# Altium PCB PCB1.pcbdoc
Units mm, origin at the board's own origin, x right, y up, seen from the top; angles counter-clockwise.
Board outline 87.77 x 46.7 mm, 2 copper layers (Top Layer, Bottom Layer); 64 components, 50 nets, 224 pads, 100 vias.
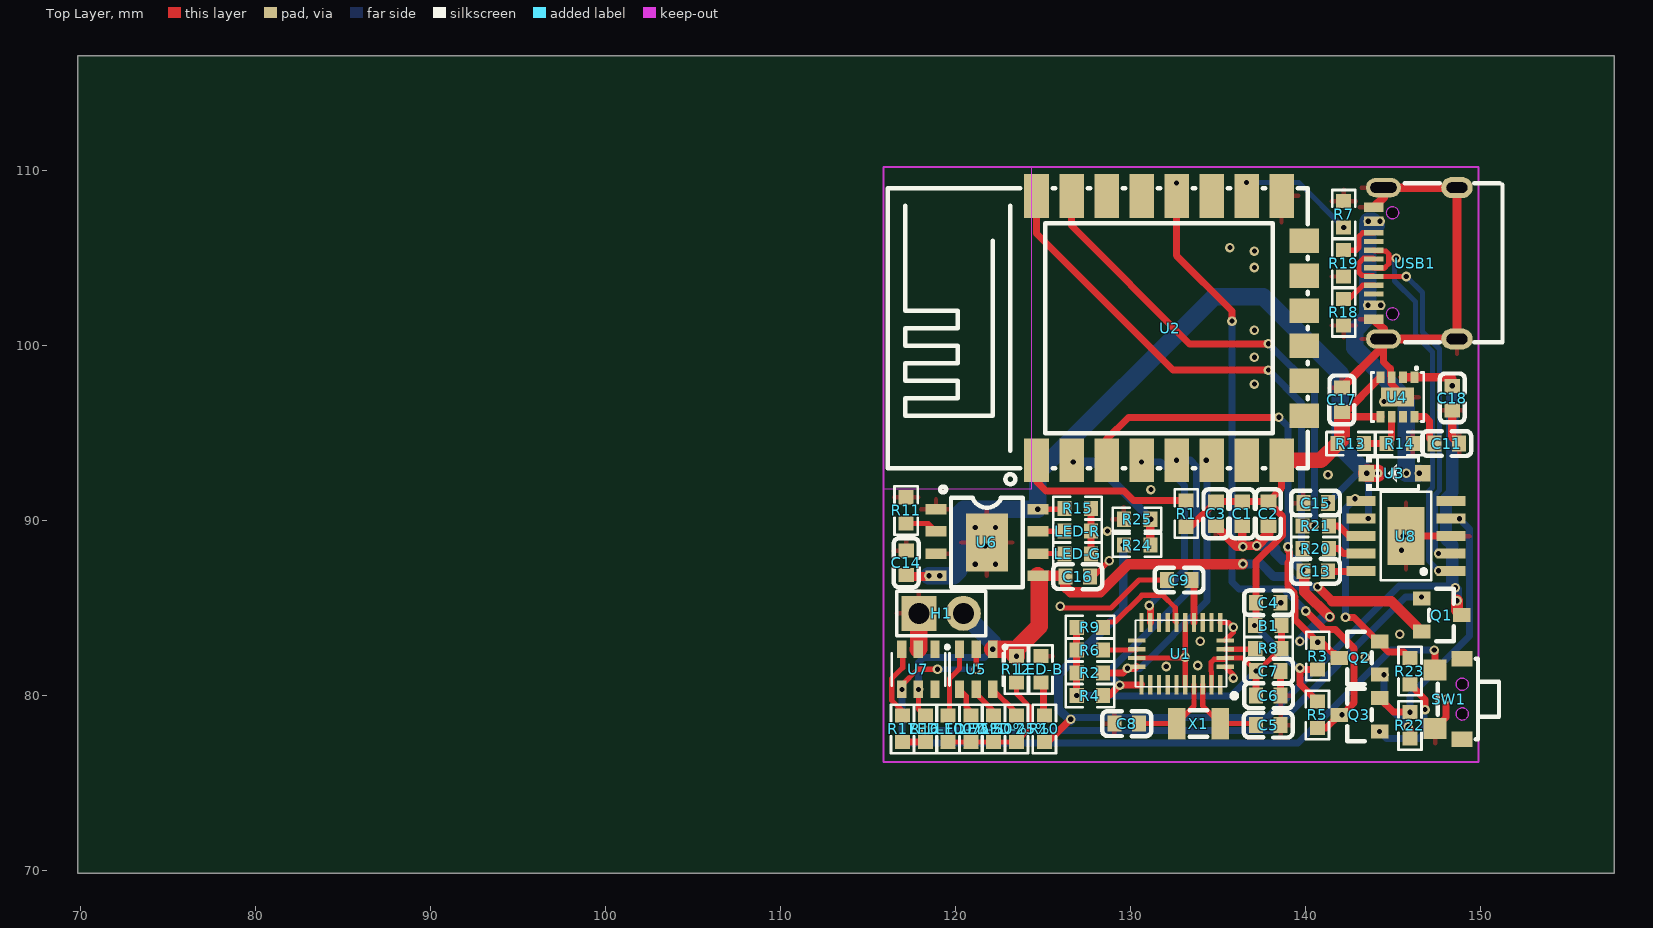
[diagram p0: Top Layer view]
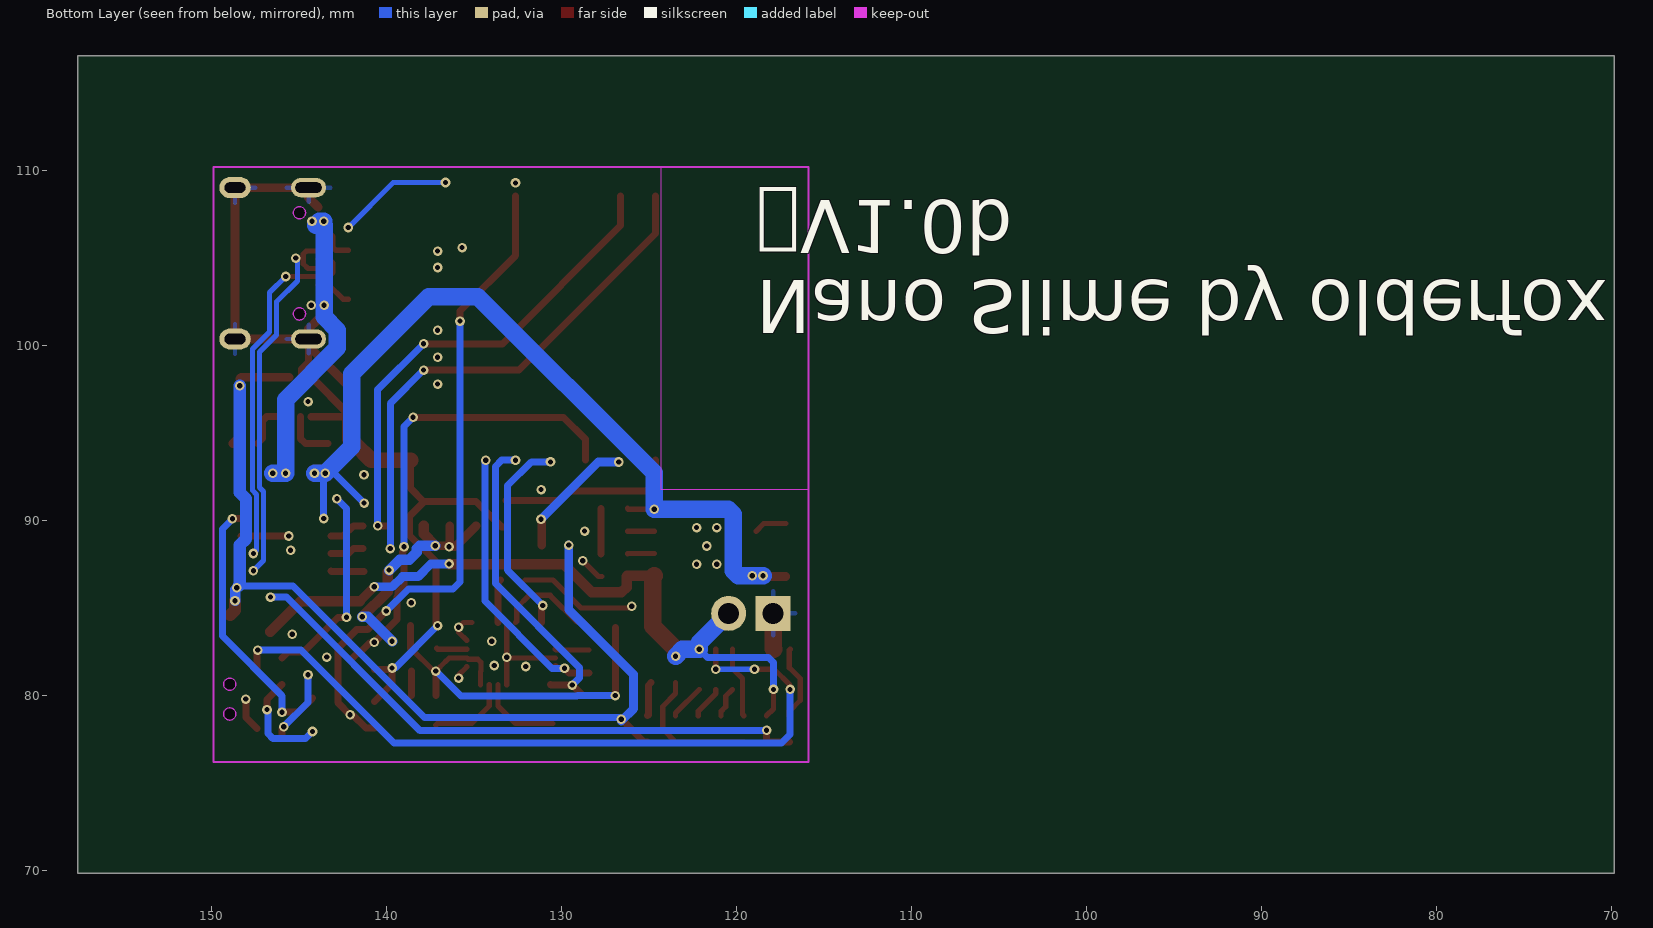
[diagram p1: Bottom Layer view, seen from below]

## Layer stack, top to bottom
Top Layer: signal copper (thickness not stored)
Dielectric: dielectric 0.32, FR-4, Dk 4.8
Bottom Layer: signal copper (thickness not stored)

## Board outline
157.623,69.85 69.85,69.85 69.85,116.55 157.623,116.55

## Design rules (kind name [scope] priority, off if disabled: settings)
BoardOutlineClearance copperThickness1oz [All] p0: genericclearance=0.254 ignorepadtopadclearanceinfootprint=FALSE except(0: Arc-SplitContinuation Track-SplitContinuation SMDPad-SplitContinuation THPad-SplitContinuation Via-SplitContinuation Fill-SplitContinuation Poly-SplitContinuation Region-SplitContinuation Text-SplitContinuation; 0.152: SMDPad-CutoutEdge THPad-CutoutEdge Via-CutoutEdge Fill-CutoutEdge Region-CutoutEdge; 0.3: Track-OutlineEdge SMDPad-OutlineEdge THPad-OutlineEdge Via-OutlineEdge Fill-OutlineEdge Region-OutlineEdge Poly-OutlineEdge Text-OutlineEdge Track-CutoutEdge)
BoardOutlineClearance copperThickness2oz [All] p0: genericclearance=0.254 ignorepadtopadclearanceinfootprint=FALSE except(0: Arc-SplitContinuation Track-SplitContinuation SMDPad-SplitContinuation THPad-SplitContinuation Via-SplitContinuation Fill-SplitContinuation Poly-SplitContinuation Region-SplitContinuation Text-SplitContinuation; 0.152: SMDPad-CutoutEdge THPad-CutoutEdge Via-CutoutEdge Fill-CutoutEdge Region-CutoutEdge; 0.3: Track-OutlineEdge SMDPad-OutlineEdge THPad-OutlineEdge Via-OutlineEdge Fill-OutlineEdge Region-OutlineEdge Poly-OutlineEdge Text-OutlineEdge Track-CutoutEdge)
Clearance copperThickness1oz [(InNet('VDD') OR InNet('VDDA') OR InNet('GND') OR InNet('OSC2') OR InNet('OSC1') OR InNet('CAP2') OR InNet('CAP1') OR InNet('VBAT') OR InNet('LED1') OR InNet('$1N34678') OR InNet('LED2') OR InNet('LED3') OR InNet('LED4') OR InNet('$1N12478') OR InNet('STBY') OR InNet('$1N26812') OR InNet('CHRG') OR InNet('$1N9628') OR InNet('RTS') OR InNet('EN') OR InNet('$1N9784') OR InNet('DTR') OR InNet('IO0') OR InNet('BAT+') OR InNet('$1N34452') OR InNet('SDA') OR InNet('SCL') OR InNet('SDO') OR InNet('$1N10095') OR InNet('$1N10091') OR InNet('BOOT') OR InNet('NRST') OR InNet('RXD0') OR InNet('RXD') OR InNet('TXD0') OR InNet('TXD') OR InNet('VBUS') OR InNet('ISET') OR InNet('MOS') OR InNet('KEY') OR InNet('INT1') OR InNet('D+') OR InNet('D-') OR InNet('VCCIN') OR InNet('RST') OR InNet('IO15') OR InNet('DCSS') OR InNet('DCFB') OR InNet('INT2') OR InNet('ADC'))] p1: gap=0.178 ignorepadtopadclearanceinfootprint=FALSE except(0.102: Track-Track; 0.152: Track-SMDPad SMDPad-SMDPad Track-THPad SMDPad-THPad THPad-THPad Track-Via SMDPad-Via THPad-Via Via-Via Track-Fill SMDPad-Fill THPad-Fill Via-Fill Fill-Fill SMDPad-Region THPad-Region Via-Region Fill-Region Region-Region Track-Poly SMDPad-Poly THPad-Poly Via-Poly Fill-Poly Poly-Poly Track-Text SMDPad-Text THPad-Text Via-Text Fill-Text Region-Text Poly-Text Text-Text; 0.175: Track-Hole SMDPad-Hole THPad-Hole Via-Hole Fill-Hole Region-Hole Poly-Hole Text-Hole Sheet-Hole; 0.3: Track-Region Region-Poly Track-Sheet SMDPad-Sheet THPad-Sheet Via-Sheet Fill-Sheet Region-Sheet Poly-Sheet Text-Sheet)
Clearance copperThickness2oz [All] p1: gap=0.178 ignorepadtopadclearanceinfootprint=FALSE except(0.152: Track-SMDPad SMDPad-SMDPad Track-THPad SMDPad-THPad THPad-THPad Track-Via SMDPad-Via THPad-Via Via-Via Track-Fill SMDPad-Fill THPad-Fill Via-Fill Fill-Fill SMDPad-Region THPad-Region Via-Region Fill-Region Region-Region Track-Poly SMDPad-Poly THPad-Poly Via-Poly Fill-Poly Poly-Poly Track-Text SMDPad-Text THPad-Text Via-Text Fill-Text Region-Text Poly-Text Text-Text; 0.175: Track-Hole SMDPad-Hole THPad-Hole Via-Hole Fill-Hole Region-Hole Poly-Hole Text-Hole Sheet-Hole; 0.203: Track-Track; 0.3: Track-Region Region-Poly Track-Sheet SMDPad-Sheet THPad-Sheet Via-Sheet Fill-Sheet Region-Sheet Poly-Sheet Text-Sheet)
DiffPairsRouting differentialPair [All] p1: maxuncoupledlength=10 minlimit=5.9843 maxlimit=5.9843 mostfreqgap=5.9843 toplayer_minwidth=5 toplayer_prefwidth=10 toplayer_maxwidth=100 bottomlayer_minwidth=5 bottomlayer_prefwidth=10 bottomlayer_maxwidth=100
PasteMaskExpansion pasteMaskExpansion [All] p1: expansion=0
PlaneConnect innerPlane [All] p1: planeconnectstyle=Relief reliefexpansion=0.508 reliefentries=4 reliefconductorwidth=0.254 reliefairgap=0.254
PolygonConnect copperRegion [All] p1: connectstyle=Relief reliefentries=4 reliefconductorwidth=10 polygonreliefangle="90 Angle" airgapwidth=10
RoutingVias viaSize [All] p1: viastyle="Through Hole" holewidth=12.0078 minholewidth=11.811 maxholewidth=248.0314 width=24.0158 minwidth=19.685 maxwidth=393.7008
SolderMaskExpansion solderMaskExpansion [All] p1: useseparateexpansions=TRUE expansion=2.0079 expansionbottom=2.0079
Width copperThickness1oz [All] p1: maxlimit=100 minlimit=12 preferedwidth=31
Width copperThickness2oz [All] p1: maxlimit=100 minlimit=12 preferedwidth=31

## Components (designator, comment, footprint, x,y, rotation, side; value= is the part's Value field where it differs from the comment)
B1 "" R0603 137.872,84 r0 top locked
C1 "" C0603 136.372,90.4 r90 top
C2 "" C0603 137.872,90.4 r90 top
C3 "" C0603 134.872,90.4 r90 top
C4 "" C0603 137.872,85.3 r180 top locked
C5 "" C0603 137.872,78.315 r0 top
C6 "" C0603 137.872,80 r180 top locked
C7 "" C0603 137.872,81.4 r180 top locked
C8 "" C0603 129.772,78.4 r180 top
C9 "" C0603 132.772,86.6 r0 top
C11 "" C0603 148.072,94.4 r0 top
C13 "" C0603 140.572,87.1 r0 top
C14 "" C0603 117.172,87.589 r270 top
C15 "" C0603 140.572,91 r0 top
C16 "" C0603 126.972,86.8 r180 top
C17 "" C0603 142.072,96.9 r90 top
C18 "" C0603 148.372,97 r270 top
H1 "" HDR-TH_2P-P2.54-V-M 119.172,84.7 r0 top
LED-25% "" R0603 123.472,78.1 r90 top locked
LED-50% "" R0603 122.172,78.1 r90 top locked
LED-75% "" R0603 120.872,78.1 r90 top locked
LED-100% "" R0603 119.572,78.1 r90 top locked
LED-B "" R0603 124.872,81.5 r90 top
LED-G "" R0603 126.972,88.1 r180 top
LED-R "" R0603 126.972,89.4 r180 top
Q1 "" SOT-23_L2.9-W1.3-P1.90-LS2.4-BR 147.772,84.6 r180 top
Q2 "" SOT-23_L2.9-W1.3-P1.90-LS2.4-BR 143.074,82.154 r0 top
Q3 "" SOT-23_L2.9-W1.3-P1.90-LS2.4-BR 143.072,78.9 r0 top
R1 "" R0603 133.172,90.4 r270 top
R2 "" R0603 127.672,81.3 r0 top locked
R3 "" R0603 140.688,82.255 r270 top
R4 "" R0603 127.672,80 r0 top locked
R5 "" R0603 140.672,78.9 r90 top
R6 "" R0603 127.672,82.6 r180 top locked
R7 "" R0603 142.172,107.5 r90 top
R8 "" R0603 137.872,82.7 r0 top locked
R9 "" R0603 127.672,83.9 r180 top locked
R10 "" R0603 125.072,78.1 r270 top
R11 "" R0603 117.172,90.582 r270 top
R12 "" R0603 123.472,81.5 r90 top locked
R13 "" R0603 142.572,94.4 r180 top
R14 "" R0603 145.372,94.4 r0 top
R15 "" R0603 126.972,90.7 r0 top
R16 "" R0603 118.272,78.1 r270 top locked
R17 "" R0603 116.972,78.1 r90 top locked
R18 "" R0603 142.172,101.9 r270 top
R19 "" R0603 142.172,104.7 r270 top
R20 "" R0603 140.572,88.4 r180 top
R21 "" R0603 140.572,89.7 r180 top
R22 "" R0603 145.961,78.3 r270 top
R23 "" R0603 145.961,81.4 r270 top
R24 "" R0603 130.372,88.6 r180 top
R25 "" R0603 130.372,90.074 r0 top
SW1 "" SW-SMD_TS24CA 148.172,79.8 r270 top
U1 "" BNO08X 132.872,82.4 r270 top locked
U2 "" WIFIM-SMD_ESP-12F-ESP8266MOD 132.272,101 r0 top locked
U3 "" SOD-123_L2.7-W1.6-LS3.7-FD 145.072,92.7 r180 top
U4 "" USIP-8_L3.0-W2.8-P0.65-TL-EP 145.244,97.059 r270 top
U5 "" SOT-23-6_L2.9-W1.7-P0.95-LS2.8-BL 121.172,81.5 r180 top locked
U6 "" ESOP-8_L4.9-W3.9-P1.27-LS6.0-BL-EP 121.786,88.749 r270 top
U7 "" SOT-23-6_L2.9-W1.7-P0.95-LS2.8-BL 117.872,81.5 r180 top locked
U8 "" ESOP-10_L4.9-W3.9-P1.00-LS6.0-BL-EP 145.733,89.118 r90 top
USB1 "" USB-C-SMD_TYPE-C-6PIN-2MD-073 146.272,104.7 r90 top locked
X1 "" FC-135R_L3.2-W1.5 133.872,78.4 r0 top

## Footprints (in the part's own frame and the unit in brackets; to place one, negate y for a bottom-side part, rotate by r counter-clockwise, add the part's x,y. Pads: shape width x height; smd on the part's side, far side on the other; paste and mask are expansions set on the pad)
BNO08X [mm]
  rect 1.1x0.25 smd: 1(1.78,2.25) 6(-1.774,2.25) 7(-1.774,1.75) 8(-1.774,1.25) 9(-1.774,0.75) 10(-1.774,0.25) 11(-1.774,-0.25) 12(-1.774,-0.75) 13(-1.774,-1.25) 14(-1.774,-1.75) 15(-1.774,-2.25) 20(1.78,-2.25) 21(1.78,-1.75) 22(1.78,-1.25) 23(1.78,-0.75) 24(1.78,-0.25) 25(1.78,0.25) 26(1.78,0.75) 27(1.78,1.25) 28(1.78,1.75)
  rect 0.25x1 smd: 2(0.75,2.529) 3(0.25,2.529) 4(-0.25,2.529) 5(-0.75,2.529) 16(-0.75,-2.529) 17(-0.25,-2.529) 18(0.25,-2.529) 19(0.75,-2.529)
  silkscreen extent -1.9,-2.6 2.54,3.18
C0603 [mm]
  rect 0.8x0.9 smd: 1(-0.7,0) 2(0.7,0)
  silkscreen extent -1.41,-0.71 1.39,0.72
ESOP-8_L4.9-W3.9-P1.27-LS6.0-BL-EP [mm]
  rect 0.6x1.2 smd: 1(-1.905,-2.908) 2(-0.635,-2.908) 3(0.635,-2.908) 4(1.905,-2.908) 5(1.905,2.908) 6(0.635,2.908) 7(-0.635,2.908) 8(-1.905,2.908)
  rect 3.3x2.4 smd: 9(0,0)
  silkscreen extent -3.2,-2.67 2.55,2.05
ESOP-10_L4.9-W3.9-P1.00-LS6.0-BL-EP [mm]
  rect 0.56x1.64 smd: 1(-2,-2.57) 2(-1,-2.57) 3(0,-2.57) 4(1,-2.57) 5(2,-2.57) 6(2,2.57) 7(1,2.57) 8(0,2.57) 9(-1,2.57) 10(-2,2.57)
  rect 3.3x2.1 smd: 11(0,0)
  silkscreen extent -2.53,-1.45 2.53,1.45
FC-135R_L3.2-W1.5 [mm]
  rect 1x1.8 smd: 1(-1.25,0) 2(1.25,0)
  silkscreen extent -0.51,-0.76 0.51,0.76
HDR-TH_2P-P2.54-V-M [mm]
  rect 2x2 hole 1.2: 1(-1.27,0)
  round 2 hole 1.2: 2(1.27,0)
  silkscreen extent -2.54,-1.27 2.54,1.27
R0603 [mm]
  rect 0.806x0.864 smd: 1(-0.753,0) 2(0.753,0)
  silkscreen extent -1.39,-0.66 1.39,0.66
SOD-123_L2.7-W1.6-LS3.7-FD [mm]
  rect 0.88x0.96 smd: 1(-1.61,0) 2(1.61,0)
  silkscreen extent -1.38,-1 1.6,1
SOT-23-6_L2.9-W1.7-P0.95-LS2.8-BL [mm]
  rect 0.532x0.99 smd: 1(-0.95,-1.145) 2(0,-1.145) 3(0.95,-1.145) 4(0.95,1.145) 5(0,1.145) 6(-0.95,1.145)
  silkscreen extent -1.75,-1.37 1.53,0.93
SOT-23_L2.9-W1.3-P1.90-LS2.4-BR [mm]
  rect 1x0.8 smd: 1(1.15,-0.95) 2(1.15,0.95) 3(-1.15,0)
  silkscreen extent -0.7,-1.5 0.7,1.5
SW-SMD_TS24CA [mm]
  rect 0.9x1.2 smd: 1(-2.3,0.775) 2(2.3,0.775)
  rect 1.2x1.3 smd: 3(-1.675,-0.775) 4(1.675,-0.775)
  Board Outline Layer circle w0.005: c-0.85,0.775 r0.35
  Board Outline Layer circle w0.005: c0.85,0.775 r0.35
  Board Outline Layer region: -0.85,1.125 -0.698,1.09 -0.576,0.993 -0.509,0.853 -0.509,0.697 -0.576,0.557 -0.698,0.46 -0.85,0.425 -0.85,0.425 -1.002,0.46 -1.124,0.557 -1.191,0.697 -1.191,0.853 -1.124,0.993 -1.002,1.09 -0.85,1.125
  Board Outline Layer region: 0.85,1.125 1.002,1.09 1.124,0.993 1.191,0.853 1.191,0.697 1.124,0.557 1.002,0.46 0.85,0.425 0.85,0.425 0.698,0.46 0.576,0.557 0.509,0.697 0.509,0.853 0.576,0.993 0.698,1.09 0.85,1.125
  Multi-Layer board cut-out: -0.85,1.125 -0.698,1.09 -0.576,0.993 -0.509,0.853 -0.509,0.697 -0.576,0.557 -0.698,0.46 -0.85,0.425 -0.85,0.425 -1.002,0.46 -1.124,0.557 -1.191,0.697 -1.191,0.853 -1.124,0.993 -1.002,1.09 -0.85,1.125
  Multi-Layer board cut-out: 0.85,1.125 1.002,1.09 1.124,0.993 1.191,0.853 1.191,0.697 1.124,0.557 1.002,0.46 0.85,0.425 0.85,0.425 0.698,0.46 0.576,0.557 0.509,0.697 0.509,0.853 0.576,0.993 0.698,1.09 0.85,1.125
  silkscreen extent -2.3,-0.62 2.3,2.88
USB-C-SMD_TYPE-C-6PIN-2MD-073 [mm]
  rect 0.55x1.1 smd: 1(-3.2,2.375) 2(-2.4,2.375) 11(2.4,2.375) 12(3.2,2.375)
  rect 0.3x1.1 smd: 3(-1.75,2.375) 4(-1.25,2.375) 5(-0.75,2.375) 6(-0.25,2.375) 7(0.25,2.375) 8(0.75,2.375) 9(1.25,2.375) 10(1.75,2.375)
  oval 1.2x1.8 hole 0.6 slot 1.2 at 90 deg: 13(-4.325,-2.375) 14(4.325,-2.375)
  oval 1.1x2 hole 0.6 slot 1.5 at 90 deg: 13(-4.325,1.825) 14(4.325,1.825)
  Board Outline Layer circle w0.005: c-2.89,1.305 r0.35
  Board Outline Layer circle w0.005: c2.89,1.305 r0.35
  Board Outline Layer region: -2.89,0.955 -3.042,0.99 -3.164,1.087 -3.231,1.227 -3.231,1.383 -3.164,1.523 -3.042,1.62 -2.89,1.655 -2.89,1.655 -2.738,1.62 -2.616,1.523 -2.549,1.383 -2.549,1.227 -2.616,1.087 -2.738,0.99 -2.89,0.955
  Board Outline Layer region: 2.89,0.955 2.738,0.99 2.616,1.087 2.549,1.227 2.549,1.383 2.616,1.523 2.738,1.62 2.89,1.655 2.89,1.655 3.042,1.62 3.164,1.523 3.231,1.383 3.231,1.227 3.164,1.087 3.042,0.99 2.89,0.955
  Multi-Layer board cut-out: -2.89,0.955 -3.042,0.99 -3.164,1.087 -3.231,1.227 -3.231,1.383 -3.164,1.523 -3.042,1.62 -2.89,1.655 -2.89,1.655 -2.738,1.62 -2.616,1.523 -2.549,1.383 -2.549,1.227 -2.616,1.087 -2.738,0.99 -2.89,0.955
  Multi-Layer board cut-out: 2.89,0.955 2.738,0.99 2.616,1.087 2.549,1.227 2.549,1.383 2.616,1.523 2.738,1.62 2.89,1.655 2.89,1.655 3.042,1.62 3.164,1.523 3.231,1.383 3.231,1.227 3.164,1.087 3.042,0.99 2.89,0.955
  silkscreen extent -4.5,-4.97 4.57,0.6
USIP-8_L3.0-W2.8-P0.65-TL-EP [mm]
  rect 0.65x0.45 smd: 1(-1.125,0.975) 2(-1.125,0.325) 3(-1.125,-0.325) 4(-1.125,-0.975) 5(1.125,-0.975) 6(1.125,-0.325) 7(1.125,0.325) 8(1.125,0.975)
  rect 1.1x1.9 smd: 9(0,0)
  silkscreen extent -1.73,-1.5 1.4,1.5
WIFIM-SMD_ESP-12F-ESP8266MOD [mm]
  rect 1.4x2.5 smd: 1(-7.651,-7.551) 2(-5.651,-7.551) 3(-3.651,-7.551) 4(-1.651,-7.551) 5(0.349,-7.551) 6(2.349,-7.551) 7(4.349,-7.551) 8(6.349,-7.551) 9(6.349,7.549) 10(4.349,7.55) 11(2.349,7.551) 12(0.349,7.551) 13(-1.651,7.55) 14(-3.651,7.551) 15(-5.651,7.55) 16(-7.651,7.551)
  rect 1.7x1.4 smd: 17(7.651,-5) 18(7.649,-3.002) 19(7.65,-1.003) 20(7.65,0.997) 21(7.65,2.997) 22(7.65,4.997)
  silkscreen extent -16.15,-8.92 7.85,8

## Via types
v1: diameter 0.55, hole 0.3, Top Layer to Bottom Layer, 100 vias

## Nets (pads, with @x,y where several pads share a name; then routed paths per layer and width w, separated by ;. In a path a pad name is that pad's centre, name@x,y a point inside that pad or via, vN(x,y) a via of type N, cw(c..) or ccw(c..) an arc to the next point about the centre after c; other vN are vias at no path point)
$1N9628: Q2.1 R22.2 | length 4.3
  Top Layer w0.4: v1(145.861,78.223) 145.961,78.123 R22.2
  Bottom Layer w0.4: v1(144.474,81.198) 144.474,79.61 v1(145.861,78.223)
$1N9784: Q3.1 R23.2 | length 6
  Top Layer w0.4: R23.2 146.82,79.788 v1(146.82,79.2)
  Bottom Layer w0.4: v1(144.222,77.95) 144.622,77.55 146.489,77.55 146.772,77.833 146.772,79.152 v1(146.82,79.2)
$1N10091: R19.1 USB1.10 | length 2.5
  Top Layer w0.3: R19.1 142.9,105.453 143.045,105.598 143.045,106.225 143.27,106.45 USB1.10
$1N10095: R18.1 USB1.4 | length 2.1
  Top Layer w0.3: R18.1 142.473,102.653 143.27,103.45 USB1.4
$1N12478: LED-B.1 R10.1 | length 2
  Top Layer w0.4: LED-B.1 125.032,80.587 125.032,78.893 R10.1
$1N26812: LED-G.1 LED-R.1 R15.2 | length 2.6
  Top Layer w0.4: LED-G.1 LED-R.1 R15.2
$1N34452: Q1.1 R16.2 R17.1 | length 33.6
  Top Layer w0.4: R17.1 R16.2 v1(118.272,78.023) ; Q1.1 v1(146.622,85.629)
  Bottom Layer w0.4: v1(118.272,78.023) 118.301,77.995 138.066,77.995 145.701,85.629 v1(146.622,85.629)
$1N34678: LED-25%.1 LED-50%.1 LED-75%.1 LED-100%.1 R12.1 | length 7.9
  Top Layer w0.3: LED-100%.1 LED-75%.1 LED-50%.1 LED-25%.1 124.206,78.081 124.206,79.382 123.472,80.116 R12.1
ADC: R24.1 R25.2 U2.2 | length 7.3
  Top Layer w0.5: R24.1 R25.2
  Bottom Layer w0.5: v1(126.721,93.349) 127.892,93.349 v1(131.167,90.074)
BAT+: C16.2 H1.2 Q1.2 R12.2 R16.1 U5.1 U6.5 U7.5 | length 43.7
  Top Layer w0.3: v1(117.881,80.355) 117.881,79.244 R16.1
  Top Layer w0.5: v1(140.686,86.214) 141.516,85.384
  Top Layer w0.6: U6.5 126.228,86.844 C16.2 126.272,86.2 126.574,85.898 128.259,85.898 129.863,87.502 136.392,87.502 v1(136.416,87.526) ; 141.516,85.384 144.888,85.384 Q1.2
  Top Layer w1: v1(122.122,82.645) 123.08,82.645 v1(123.472,82.253) 123.472,82.653 124.772,83.953 124.772,86.767 U6.5
  Bottom Layer w0.4: v1(117.881,80.355) 117.872,80.364 117.872,81.9 118.155,82.183 121.66,82.183 v1(122.122,82.645)
  Bottom Layer w0.5: v1(136.416,87.526) 137.446,87.526 138.172,86.8 139.072,86.8 139.658,86.214 v1(140.686,86.214)
  Bottom Layer w1: H1.2 122.122,83.02 v1(122.122,82.645) 123.08,82.645 v1(123.472,82.253)
BOOT: R8.1 U1.4 | length 1.7
  Top Layer w0.3: U1.4 137.069,82.65 R8.1
CAP1: C9.2 U1.9 | length 2.5
  Top Layer w0.4: C9.2 133.622,86.45 U1.9
CAP2: C13.2 U8.10 | length 1.9
  Top Layer w0.4: C13.2 143.145,87.1 U8.10
CHRG: LED-R.2 U6.7 | length 1.5
  Top Layer w0.3: U6.7 126.203,89.384 LED-R.2
D+: U8.1 USB1.6 USB1.8 | length 22.1
  Top Layer w0.3: USB1.6 143.945,104.402 144.476,104.402 144.749,104.675 144.749,104.961 ; USB1.8 143.945,105.402 144.572,105.402 144.749,105.225 144.749,104.961 ; v1(145.172,105) 144.788,105 144.749,104.961
  Bottom Layer w0.3: v1(145.172,105) 145.072,104.9 145.072,103.7 146.27,102.502 146.27,100.608 147.249,99.628 147.249,91.897 147.016,91.664 147.016,87.72 v1(147.595,87.141)
D-: U8.2 USB1.5 USB1.7 | length 21.1
  Top Layer w0.3: USB1.7 143.849,104.998 143.318,104.998 143.045,104.725 143.045,104.175 143.222,103.998 143.849,103.998 USB1.5 v1(145.749,103.95)
  Bottom Layer w0.3: v1(145.749,103.95) 146.672,103.027 146.672,100.774 147.651,99.795 147.651,91.731 147.418,91.497 147.418,88.295 v1(147.595,88.118)
DCFB: R13.1 R14.1 U4.6 | length 3
  Top Layer w0.4: R13.1 R14.1 144.919,94.7 U4.6
DCSS: C11.1 U4.8 | length 2.4
  Top Layer w0.4: U4.8 146.838,95.934 147.072,95.7 147.072,94.7 C11.1
DTR: Q3.2 R22.1 U8.4 | length 15.3
  Top Layer w0.4: Q3.2 145.019,79.053 v1(145.961,79.053) ; U8.4 148.781,90.118 v1(148.797,90.102)
  Bottom Layer w0.4: v1(145.961,79.053) 145.961,79.99 149.372,83.4 149.372,89.527 v1(148.797,90.102)
EN: Q2.3 R3.1 U2.3 | length 26.7
  Top Layer w0.4: U2.3 128.621,94.649 129.872,95.9 v1(138.472,95.9) ; v1(138.988,88.5) 138.988,88.294 139.063,88.219 139.063,87.682 138.988,87.607 138.988,86.231 139.324,85.896 139.324,85.697 139.381,85.64 139.381,84.357 v1(140.688,83.05) ; R3.1@140.954,83.008 141.558,82.404 141.674,82.404 Q2.3
  Bottom Layer w0.4: v1(138.472,95.9) 138.988,95.384 v1(138.988,88.5)
GND: C1.1 C2.1 C3.1 C4.1 C5.2 C6.1 C7.1 C8.2 C9.1 C11.2 C13.1 C14.1 C15.1 C16.1 C17.2 C18.2 H1.1 LED-B.2 R7.2 R11.1 R14.2 R18.2 R19.2 R25.1 SW1.4 U1.2 U1.5 U1.6 U1.10 U1.18 U1.25 U2.9 U4.3 U4.9 U6.1 U6.3 U6.9 U7.2 U8.3 U8.11 USB1.1 USB1.12 USB1.13 USB1.14 | length 68.6
  Top Layer w0.3: v1(125.972,85.1) 126.072,85 128.872,85 130.472,86.6 C9.1 ; C16.1 127.872,86.8 v1(128.772,87.7) ; U1.18 133.077,82.15 v1(133.12,82.193) ; U1.25 133.12,80.623 v1(133.12,82.193) ; U1.10 133.12,84.172 v1(133.12,82.193) ; U1.6 135.598,84.174 v1(135.872,83.9) 135.872,83.621 U1.5 ; U1.2 135.872,81.179 v1(135.872,81)
  Top Layer w0.4: C6.1 C7.1 ; USB1.13@144.447,99.975 144.447,99.054 144.846,98.655 144.846,98.257 U4.3@144.872,98.231 ; U4.3 U4.3@144.872,98.231 ; U4.9 145.244,97.461 144.872,97.833 U4.3@144.872,98.231 ; U8.11 U8.3 ; SW1.4 148.029,78.757 v1(148.029,79.8)
  Top Layer w0.5: C3.1 136.072,88.5 v1(136.416,88.5) ; C1.1 136.372,88.544 v1(136.416,88.5) ; v1(137.203,88.569) 136.486,88.569 v1(136.416,88.5) ; C17.2@141.972,97.5 144.447,99.975 USB1.13@144.447,100.375 ; USB1.1 144.447,100.95 USB1.13@144.447,100.375 ; USB1.12 144.447,108.45 144.447,109.025 148.647,109.025 148.647,100.375 USB1.13@144.447,100.375 ; C18.2 148.372,94.8 C11.2
  Top Layer w0.6: v1(137.203,88.569) 137.872,89.239 C2.1 ; C13.1 139.926,87.046 139.926,85.946 v1(141.372,84.5)
  Top Layer w1: U7.2 117.902,82.675 H1.1
  Bottom Layer w0.6: v1(137.203,88.569) 138.09,88.569 138.261,88.399 138.261,88.199 138.689,87.771 139.243,87.771 v1(139.843,87.171) ; v1(139.672,83.1) 141.072,84.5 v1(141.372,84.5)
  other v1: 132.038,81.66 133.838,81.717 143.403,82.2 133.972,83.1 145.372,83.5 138.572,85.3 121.116,87.5 122.272,87.5 145.472,88.3 121.686,88.549 145.576,89.118 128.672,89.4 121.116,89.6 122.272,89.6 131.157,91.772 141.279,92.62 144.472,96.8 137.072,97.8 137.072,99.336 137.072,100.877 137.072,104.465 137.072,105.4 135.672,105.6
INT1: U1.14 U2.4 | length 11.7
  Top Layer w0.4: v1(131.058,85.151) 131.122,85.087 U1.14
  Bottom Layer w0.4: v1(130.621,93.353) 131.719,93.353 133.072,92 133.072,87.165 v1(131.058,85.151)
INT2: U2.7
IO0: Q3.3 R5.1 U2.12 | length 37.6
  Top Layer w0.4: U2.12 132.621,105.133 135.789,101.966 v1(135.789,101.4) ; v1(140.008,84.836) 141.08,83.764 141.713,83.764 142.776,82.7 142.776,79.605 v1(142.072,78.9) ; R5.1 141.169,78.147 Q3.3
  Bottom Layer w0.4: v1(135.789,101.4) 135.789,86.5 136.189,86.1 138.744,86.1 v1(140.008,84.836)
  other v1: 132.621,109.296
IO15: R7.1 U2.10 | length 6.6
  Bottom Layer w0.3: v1(136.621,109.316) 139.602,109.316 v1(142.172,106.747)
ISET: R11.2 U6.2 | length 1.9
  Top Layer w0.3: R11.2 118.433,89.829 U6.2
KEY: SW1.3 U5.2 U7.4 | length 42.5
  Top Layer w0.3: v1(116.931,80.355) 116.931,80.602 117.833,81.505 v1(118.967,81.505) ; v1(121.172,81.505) U5.2
  Top Layer w0.4: v1(147.347,82.6) 147.397,82.55 SW1.3
  Bottom Layer w0.3: v1(118.967,81.505) v1(121.172,81.505)
  Bottom Layer w0.4: v1(116.931,80.355) 116.931,77.787 117.418,77.3 139.574,77.3 144.874,82.6 v1(147.347,82.6)
LED1: LED-25%.2 U5.6 | length 2.1
  Top Layer w0.3: U5.6 123.472,79.005 LED-25%.2
LED2: LED-50%.2 U5.5 | length 1.9
  Top Layer w0.3: U5.5 121.172,80.117 122.172,79.117 LED-50%.2
LED3: LED-75%.2 U5.4 | length 1.8
  Top Layer w0.3: U5.4 120.604,79.973 120.604,79.368 120.872,79.1 LED-75%.2
LED4: LED-100%.2 U5.3 | length 4.1
  Top Layer w0.3: LED-100%.2 119.654,78.935 119.654,80.975 119.831,81.152 119.84,81.152 119.949,81.261 119.949,81.27 120.222,81.543 U5.3
MOS: R17.2 U7.3 | length 4.3
  Top Layer w0.3: U7.3 116.972,82.595 116.972,81.593 116.354,80.975 116.354,79.735 116.972,79.117 R17.2
NRST: R9.1 U1.11 | length 6.1
  Top Layer w0.3: R9.1 128.725,84.2 129.113,84.2 130.641,85.728 131.844,85.728 132.549,85.023 132.549,84.247 U1.11
OSC1: C5.1 U1.27 X1.2 | length 4.7
  Top Layer w0.3: U1.27 134.122,79.4 X1.2 137.087,78.4 C5.1
OSC2: C8.1 U1.26 X1.1 | length 4.8
  Top Layer w0.3: C8.1 X1.1 133.622,79.4 U1.26
RST: R1.1 U2.1 | length 10.2
  Top Layer w0.4: U2.1 124.621,92.251 125.172,91.7 129.625,91.7 130.172,91.153 130.888,91.153 130.897,91.145 131.417,91.145 131.425,91.153 R1.1
RTS: Q2.2 R23.1 U8.6 | length 11.6
  Top Layer w0.4: v1(142.279,84.473) 142.753,84.473 144.726,82.5 145.615,82.5 R23.1
  Bottom Layer w0.4: v1(142.279,84.473) 142.272,84.48 142.272,90.689 v1(142.826,91.243)
RXD: R21.1 U8.8 | length 2.1
  Top Layer w0.4: R21.1 141.891,89.7 142.473,89.118 U8.8
RXD0: R21.2 U2.15 | length 27.9
  Top Layer w0.4: U2.15 126.621,106.851 133.372,100.1 v1(137.872,100.1) ; R21.2 v1(140.495,89.7)
  Bottom Layer w0.4: v1(137.872,100.1) 140.495,97.477 v1(140.495,89.7)
SCL: R2.2 U1.19 U2.6 | length 16.3
  Top Layer w0.4: R2.2 129.559,81.3 v1(129.818,81.559) 130.252,81.559 U1.19
  Bottom Layer w0.4: v1(129.818,81.559) 130.531,81.559 134.372,85.4 134.372,93.398 v1(134.321,93.449)
SDA: R4.2 U1.20 U2.5 | length 18.4
  Top Layer w0.4: R4.2 128.776,80 v1(129.376,80.6) 130.602,80.6 U1.20
  Bottom Layer w0.4: v1(129.376,80.6) 128.976,81 128.976,81.604 133.772,86.4 133.772,93.1 133.423,93.449 v1(132.621,93.449)
SDO: R6.1 U1.17 | length 1.9
  Top Layer w0.3: R6.1 130.293,82.6 U1.17
STBY: LED-G.2 U6.6 | length 1.5
  Top Layer w0.3: U6.6 126.205,88.114 LED-G.2
TXD: R20.1 U8.9 | length 2
  Top Layer w0.4: R20.1 141.872,88.4 142.154,88.118 U8.9
TXD0: R20.2 U2.16 | length 29.6
  Top Layer w0.4: U2.16 124.621,106.4 132.421,98.6 v1(137.872,98.6)
  Bottom Layer w0.4: v1(137.872,98.6) 139.777,96.695 v1(139.777,88.4)
VBAT: C18.1 Q1.3 R10.2 R24.2 U4.1 U4.2 | length 55.1
  Top Layer w0.4: R10.2 125.268,77.347 v1(126.572,78.65)
  Top Layer w0.5: U4.2 U4.1 148.288,98.184 C18.1@148.372,98.1
  Top Layer w0.7: v1(148.645,85.417) 148.645,84.877 Q1.3
  Bottom Layer w0.4: v1@126.672,78.75 137.822,78.75 145.328,86.256 v1@148.447,86.256
  Bottom Layer w0.5: v1@126.572,78.547 125.872,79.247 125.872,81.2 129.577,84.905 v1(129.577,88.6)
  Bottom Layer w0.6: v1(148.547,86.156) 148.645,86.059 v1(148.645,85.417)
  Bottom Layer w0.7: v1(148.372,97.701) 148.372,91.6 148.02,91.248 148.02,88.952 148.372,88.6 148.372,86.332 v1@148.447,86.256
VBUS: C14.2 C15.2 R15.1 U3.2 U6.4 U6.8 U8.7 | length 50.9
  Top Layer w0.3: v1(124.695,90.654) 126.173,90.654 R15.1
  Top Layer w0.5: C14.2@117.172,86.8 118.434,86.8 v1(118.478,86.844)
  Top Layer w1: v1(143.496,92.7) v1(144.105,92.7)
  Bottom Layer w0.4: v1(141.272,91) 142.972,92.7 v1(143.496,92.7) ; v1(143.583,90.118) v1@143.583,92.613
  Bottom Layer w1: v1(118.478,86.844) v1(119.093,86.844) 119.906,86.844 120.189,87.127 120.189,90.371 120.472,90.654 v1(124.695,90.654) 124.695,92.723 134.772,102.8 137.572,102.8 141.972,98.4 141.972,94.224 v1(143.496,92.7) v1(144.105,92.7)
VCCIN: U3.1 USB1.2 USB1.11 | length 17
  Bottom Layer w1: v1@143.556,106.89 v1(143.556,102.3) 143.556,101.634 142.795,100.873 142.795,99.877 145.759,96.913 v1(145.759,92.7) v1(146.497,92.7) ; v1(143.579,107.1) 143.831,107.1 144.041,106.89
  other v1: 144.291,102.3 144.252,107.1
VDD: B1.1 C1.2 C2.2 C3.2 C4.2 C17.1 R1.2 R3.2 R5.2 R13.2 U2.8 U4.4 U4.5 | length 33.6
  Top Layer w0.4: R1.2 133.419,89.647 C3.2 C1.2 C2.2 ; B1.1 137.172,84.053 C4.2 137.172,87.652 138.674,89.154 138.674,90.246 137.872,91.048 C2.2 ; U2.8 138.621,91.849 C2.2 ; R5.2 139.672,80.653 v1(139.672,81.578) 139.748,81.502 R3.2
  Top Layer w0.45: C17.1@142.085,96 C17.1@142.137,96.052 ; U4.5 142.255,95.934 C17.1@142.137,96.052 ; U4.4 C17.1@142.137,96.052
  Top Layer w0.9: U2.8 140.868,93.449 R13.2 142.072,94.653 C17.1@142.072,96
  Bottom Layer w0.4: v1(137.072,84) 139.494,81.578 v1(139.672,81.578)
VDDA: B1.2 C6.2 C7.2 R2.1 R4.1 R6.2 R8.2 R9.2 U1.3 U1.28 | length 23.7
  Top Layer w0.3: U1.28 134.622,81.376 134.599,81.4 134.599,81.9 134.776,82.077 135.328,82.077 U1.3 136.406,82.15 136.59,81.966 136.606,81.966 v1(137.172,81.4) 137.295,81.4 138.595,82.7 R8.2
  Top Layer w0.4: v1(126.919,80) R2.1 R6.2 R9.2 ; C6.2 v1(137.172,81.4) ; R8.2 B1.2
  Bottom Layer w0.4: v1(126.919,80) 129.089,80 129.116,79.973 135.745,79.973 v1(137.172,81.4)
pads on no net: SW1.1 SW1.2 U1.1 U1.7 U1.8 U1.12 U1.13 U1.15 U1.16 U1.21 U1.22 U1.23 U1.24 U2.11 U2.13 U2.14 U2.17 U2.18 U2.19 U2.20 U2.21 U2.22 U4.7 U7.1 U7.6 U8.5 USB1.3 USB1.9

## Polygon pours and split planes (outlines as drawn)
GND on Top Layer (solid, remove dead copper, pour order 0): 115.872,110.2 149.872,110.2 149.872,76.2 115.872,76.2
GND on Bottom Layer (solid, remove dead copper, pour order 2): 115.872,110.2 149.872,110.2 149.872,76.2 115.872,76.2

## Keep-outs
Top Layer:
  region: 115.872,110.2 124.311,110.2 124.311,91.799 115.872,91.799
Bottom Layer:
  region: 115.872,110.2 124.311,110.2 124.311,91.799 115.872,91.799
Board Outline Layer:
  lines w0.1: 115.872,76.2 149.872,76.2 149.872,110.2 115.872,110.2 115.872,76.2

## Silkscreen, mask and mechanical layers (free items; w line width, h text height)
Bottom Silkscreen Layer:
  text "Nano Slime by olderfox /  V1.0b" at 118.872,108.3 h3.05 r180